# EAGLE board matrixdriver (EAGLE 7.0.0)
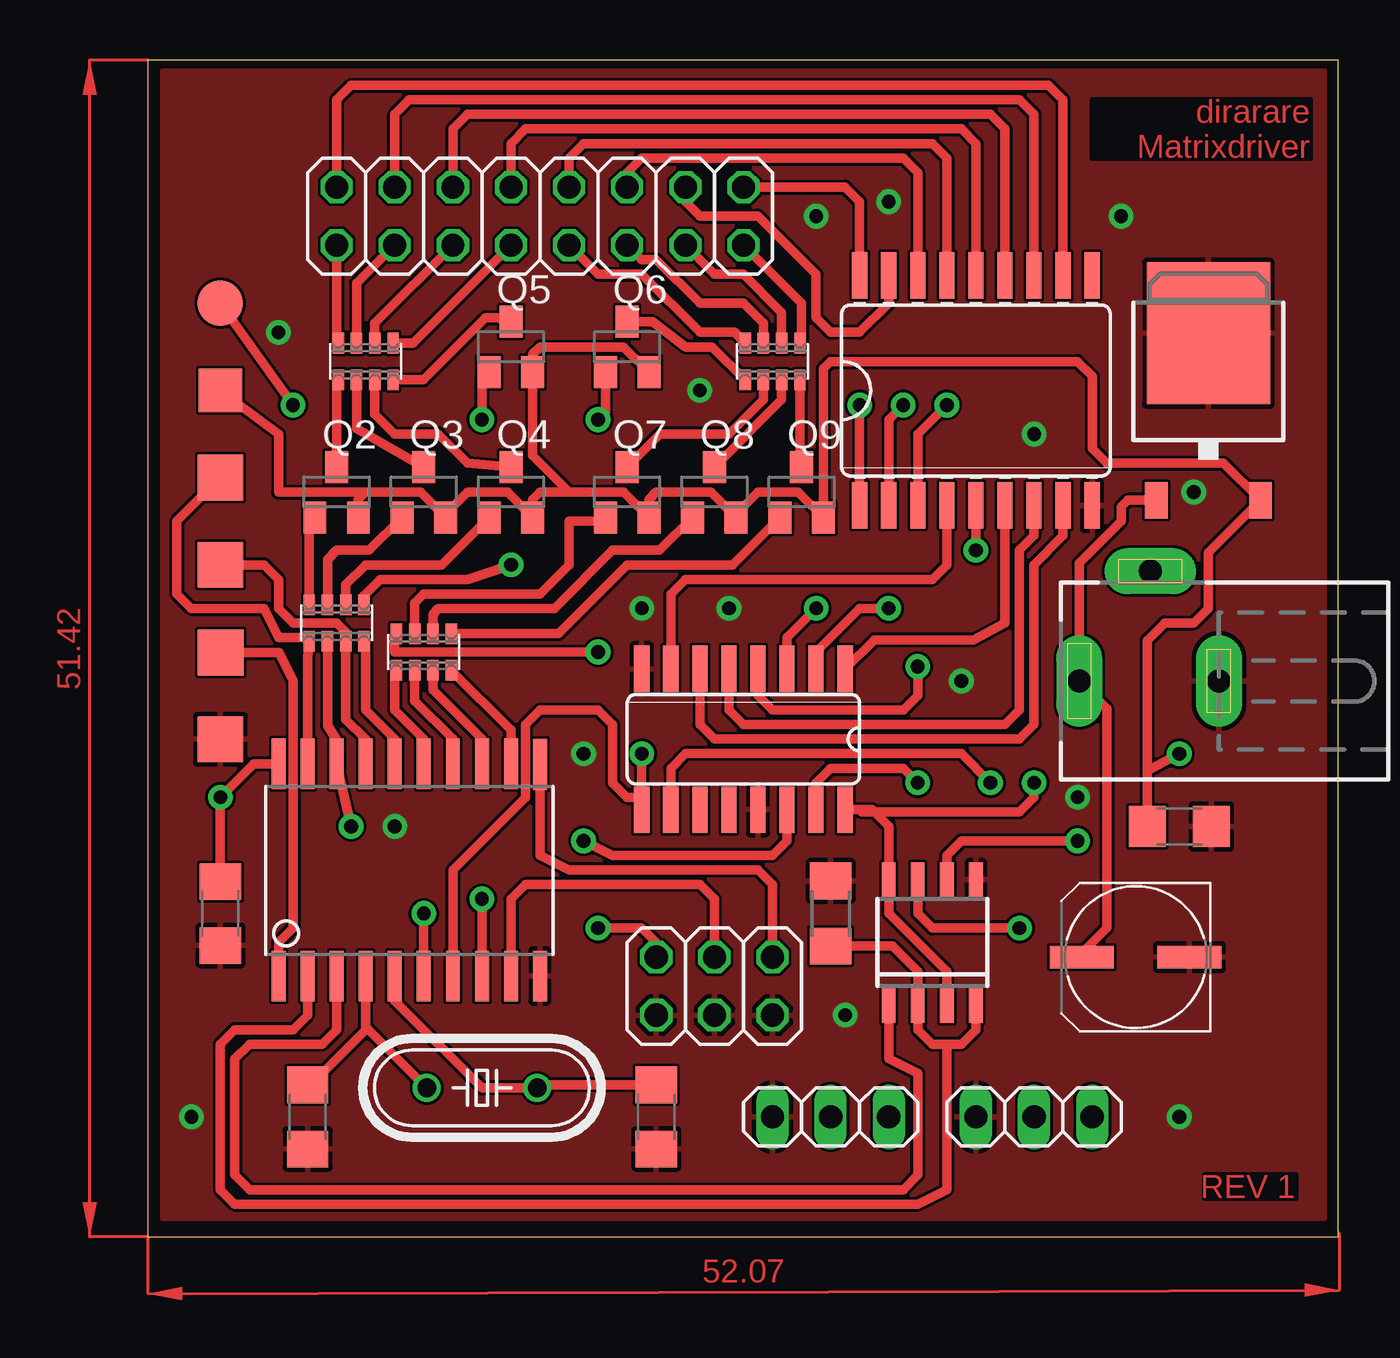
[diagram p0: board, top side]
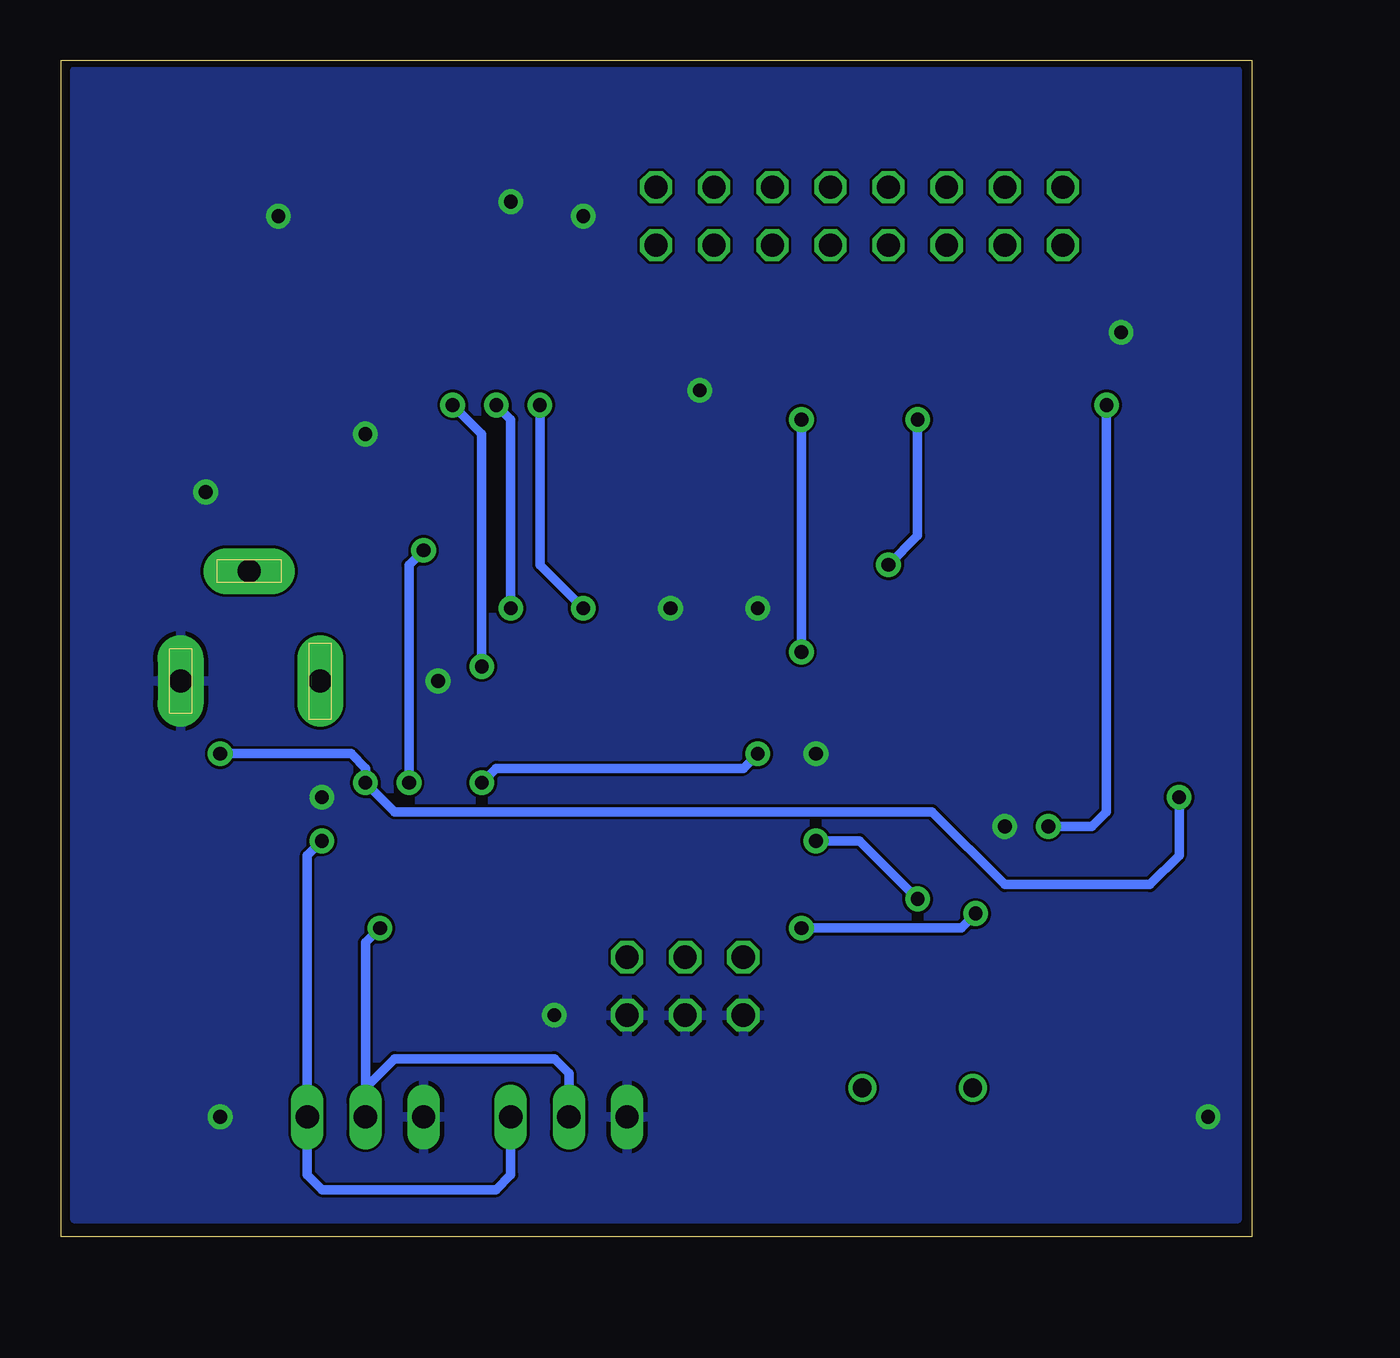
[diagram p1: board, bottom side, seen from below]

Size 52.03 x 51.42 mm. Coordinates in mm from the lower left corner, seen from the top.
Outline: 0,0 52.03,0 52.03,51.42 0,51.42 0,0
Copper layers (1*16): Top 0.035mm / dielectric 1.5mm / Bottom 0.035mm
Design rules "PCB-POOL HighSpec": minimum track width 0.125mm, minimum drill 0.2mm, track to track 0.125mm, track to pad 0.125mm, pad to pad 0.125mm, via to via 0.125mm, smd to smd 0.125mm, copper to edge 0.3mm, drill to drill 0.2mm, minimum pad ring 0.2mm, minimum via ring 0.125mm, stop-mask expansion 0.075mm, vias tented up to drill 0mil, thermal gap 0.2mm

## Footprints (pad centres in the part's own frame; a part is rotated, then mirrored left to right if it is on the bottom)
C1206 = smd 1.6 x 1.8: 1 -1.4,0; 2 1.4,0
UD-6,3X5,8_NICHICON = smd 2.8 x 1: + 2.35,0; - -2.35,0
CTS742C083 = smd 0.5 x 0.9: 1 -1.2,-0.8; 2 -0.4,-0.8; 3 0.4,-0.8; 4 1.2,-0.8; 5 1.2,0.8; 6 0.4,0.8; 7 -0.4,0.8; 8 -1.2,0.8
D_R-PDSO-G8 = smd 0.6 x 1.5: 1 -1.905,-2.75; 2 -0.635,-2.75; 3 0.635,-2.75; 4 1.905,-2.75; 5 1.905,2.75; 6 0.635,2.75; 7 -0.635,2.75; 8 -1.905,2.75
SO16 = smd 0.66 x 2.032: 1 -4.445,-3.073; 2 -3.175,-3.073; 3 -1.905,-3.073; 4 -0.635,-3.073; 5 0.635,-3.073; 6 1.905,-3.073; 7 3.175,-3.073; 8 4.445,-3.073; 9 4.445,3.073; 10 3.175,3.073; 11 1.905,3.073; 12 0.635,3.073; 13 -0.635,3.073; 14 -1.905,3.073; 15 -3.175,3.073; 16 -4.445,3.073
SO18W = smd 0.66 x 2.032: 1 -5.08,-5.029; 2 -3.81,-5.029; 3 -2.54,-5.029; 4 -1.27,-5.029; 5 0,-5.029; 6 1.27,-5.029; 7 2.54,-5.029; 8 3.81,-5.029; 9 5.08,-5.029; 10 5.08,5.029; 11 3.81,5.029; 12 2.54,5.029; 13 1.27,5.029; 14 0,5.029; 15 -1.27,5.029; 16 -2.54,5.029; 17 -3.81,5.029; 18 -5.08,5.029
TO252 = smd 1 x 1.6: 1 -2.28,-4.8; 2 2.28,-4.8 | smd 5.4 x 6.2: 3 0,2.5
DCJ0202 = drill 1 pad 2 long: 1 0,3.1; 2 4.8,0; 3 0,-3
2X08 = drill 1 octagon: 1 -8.89,-1.27; 2 -8.89,1.27; 3 -6.35,-1.27; 4 -6.35,1.27; 5 -3.81,-1.27; 6 -3.81,1.27; 7 -1.27,-1.27; 8 -1.27,1.27; 9 1.27,-1.27; 10 1.27,1.27; 11 3.81,-1.27; 12 3.81,1.27; 13 6.35,-1.27; 14 6.35,1.27; 15 8.89,-1.27; 16 8.89,1.27
1X03 = drill 1.016 long: 1 -2.54,0; 2 0,0; 3 2.54,0
2X03 = drill 1.016 octagon: 1 -2.54,-1.27; 2 -2.54,1.27; 3 0,-1.27; 4 0,1.27; 5 2.54,-1.27; 6 2.54,1.27
SOT23-BEC = smd 1 x 1.4: B -0.95,-1.1; C 0,1.1; E 0.95,-1.1
HC49/S = drill 0.813: 1 -2.413,0; 2 2.413,0
R1206 = smd 1.6 x 1.803: 1 -1.422,0; 2 1.422,0
TP20R = smd 2 x 2: TP 0,0
TP19SQ = smd 1.9 x 1.9: TP 0,0
TP20SQ = smd 2 x 2: TP 0,0
SO20L$ = smd 0.61 x 2.21: 1 -5.715,-4.636; 2 -4.445,-4.636; 3 -3.175,-4.636; 4 -1.905,-4.636; 5 -0.635,-4.636; 6 0.635,-4.636; 7 1.905,-4.636; 8 3.175,-4.636; 9 4.445,-4.636; 10 5.715,-4.636; 11 5.715,4.61; 12 4.445,4.636; 13 3.175,4.636; 14 1.905,4.636; 15 0.635,4.636; 16 -0.635,4.636; 17 -1.905,4.636; 18 -3.175,4.636; 19 -4.445,4.636; 20 -5.715,4.636

## Placement (x,y rotation side)
C1  22p  [C1206]  6.99,5.24 90 top
C2  22p  [C1206]  22.23,5.24 90 top
C3  100µ  [UD-6,3X5,8_NICHICON]  43.18,12.22 180 top
C4  10µ  [C1206]  45.09,17.94 0 top
C5  100n  [C1206]  3.17,14.13 90 top
CTS742C083_1  1k  [CTS742C083]  8.26,26.83 0 top
CTS742C083_2  1k  [CTS742C083]  12.06,25.56 0 top
CTS742C083_3  10  [CTS742C083]  9.53,38.26 0 top
CTS742C083_4  10  [CTS742C083]  27.3,38.26 0 top
IC1  75176AD  [D_R-PDSO-G8]  34.29,12.86 0 top
IC2  4017D  [SO16]  26.04,21.75 180 top
IC3  ULN2803  [SO18W]  36.2,36.99 0 top
IC4  7805DT  [TO252]  46.35,36.99 0 top
J1  DCJ0202  [DCJ0202]  43.81,24.29 90 top
JP1  LIGHTS  [2X08]  17.14,44.61 0 top
JP2  IN  [1X03]  38.73,5.24 180 top
JP3  OUT  [1X03]  29.84,5.24 180 top
JP4  P.SELECT  [2X03]  24.77,10.96 0 top
Q2  MMBT4403LT1SMD  [SOT23-BEC]  8.26,32.54 0 top
Q3  MMBT4403LT1SMD  [SOT23-BEC]  12.06,32.54 0 top
Q4  MMBT4403LT1SMD  [SOT23-BEC]  15.88,32.54 0 top
Q5  MMBT4403LT1SMD  [SOT23-BEC]  15.88,38.89 0 top
Q6  MMBT4403LT1SMD  [SOT23-BEC]  20.95,38.89 0 top
Q7  MMBT4403LT1SMD  [SOT23-BEC]  20.95,32.54 0 top
Q8  MMBT4403LT1SMD  [SOT23-BEC]  24.77,32.54 0 top
Q9  MMBT4403LT1SMD  [SOT23-BEC]  28.57,32.54 0 top
Q10  20MHZ  [HC49/S]  14.61,6.51 180 top
R17  1k  [R1206]  29.84,14.13 90 top
TP1  TPSQTP20R  [TP20R]  3.17,40.8 270 top
TP2  TPSQTP19SQ  [TP19SQ]  3.17,36.99 270 top
TP3  TPSQTP20SQ  [TP20SQ]  3.17,33.18 270 top
TP4  TPSQTP20SQ  [TP20SQ]  3.17,29.37 0 top
TP5  TPSQTP20SQ  [TP20SQ]  3.19,25.53 270 top
TP6  TPSQTP20SQ  [TP20SQ]  3.17,21.75 270 top
U$1  TINY2313  [SO20L$]  11.43,16.04 0 top

## Library data of the parts
C1 C2 C5 R17 = resistor
C3 C4 = rcl
CTS742C083_1-CTS742C083_4 = resistor-net
IC1 = 751xx
IC2 = 40xx
IC3 = uln-udn
IC4 = linear
J1 = con-jack; OC_FARNELL: unknown; OC_NEWARK: unknown
JP1 = pinhead-fixdrills
JP2-JP4 = pinhead
Q2-Q9 = transistor-pnp
Q10 = adafruit; OC_FARNELL: 1667008; OC_NEWARK: unknown
TP1-TP6 = testpad
U$1 = avr-6

## Nets
GND [GND]: C1.1 C2.1 C3.- C4.2 C5.1 IC1.5 IC2.8 IC2.13 IC3.9 IC4.3 J1.3 JP2.3 JP3.3 JP4.1 JP4.3 JP4.5 R17.2 TP6.TP U$1.10
N$1: CTS742C083_2.4 U$1.12
N$2: CTS742C083_2.3 U$1.13
N$3: CTS742C083_2.2 U$1.14
N$4: CTS742C083_2.1 U$1.15
N$5: CTS742C083_1.4 U$1.16
N$6: CTS742C083_1.3 TP4.TP U$1.17
N$7: CTS742C083_1.2 TP1.TP U$1.18
N$8: CTS742C083_1.1 TP3.TP U$1.19
N$9: IC1.1 U$1.3
N$10: IC1.2 IC1.4 R17.1 U$1.2
N$11: C1.2 Q10.2 U$1.4
N$12: C2.2 Q10.1 U$1.5
N$13: CTS742C083_4.8 JP1.9
N$14: IC3.11 JP1.2
N$15: IC2.14 U$1.8
N$16: IC2.9 IC2.15 U$1.7
N$17: IC2.3 IC3.1
N$18: IC2.2 IC3.2
N$19: IC2.4 IC3.3
N$20: IC2.7 IC3.4
N$21: IC2.10 IC3.5
N$22: IC2.1 IC3.6
N$23: IC2.5 IC3.7
N$24: IC2.6 IC3.8
N$25: IC3.18 JP1.16
N$26: IC3.17 JP1.14
N$27: IC3.16 JP1.12
N$28: IC3.15 JP1.10
N$29: CTS742C083_4.7 JP1.11
N$30: CTS742C083_4.6 JP1.13
N$31: CTS742C083_4.5 JP1.15
N$32: CTS742C083_1.7 Q3.B
N$33: CTS742C083_3.8 JP1.1
N$34: CTS742C083_3.7 JP1.3
N$35: CTS742C083_3.6 JP1.5
N$36: CTS742C083_3.5 JP1.7
N$37: CTS742C083_1.8 Q2.B
N$38: CTS742C083_1.6 Q4.B
N$39: CTS742C083_1.5 Q5.B
N$40: CTS742C083_2.6 Q8.B
N$41: CTS742C083_2.5 Q9.B
N$42: CTS742C083_2.8 Q6.B
N$43: CTS742C083_2.7 Q7.B
N$49: CTS742C083_4.4 Q9.C
N$50: CTS742C083_4.3 Q8.C
N$51: CTS742C083_4.2 Q7.C
N$52: CTS742C083_4.1 Q6.C
N$53: CTS742C083_3.4 Q5.C
N$54: CTS742C083_3.3 Q4.C
N$55: CTS742C083_3.2 Q3.C
N$56: CTS742C083_3.1 Q2.C
N$57: IC1.6 JP2.1 JP3.1
N$58: IC1.7 JP2.2 JP3.2
N$59: TP5.TP U$1.1
N$60: JP4.2 U$1.6
N$61: JP4.4 U$1.9
N$62: JP4.6 U$1.11
N$63: IC3.12 JP1.4
N$64: IC3.13 JP1.6
N$65: C3.+ IC4.1 J1.1
N$66: IC3.14 JP1.8
VCC: C4.1 C5.2 IC1.3 IC1.8 IC2.16 IC4.2 Q2.E Q3.E Q4.E Q5.E Q6.E Q7.E Q8.E Q9.E TP2.TP U$1.20

## Tracks (layer width: path | path; a pad name or v marks a point on that pad's centre or on a via)
GND  (via drill 0.6)
  other vias: 5.71,39.53 21.59,27.46 30.48,9.69 45.09,5.24 10.79,17.94 45.72,32.54 38.73,35.08 25.4,27.46 29.21,44.61 32.38,45.24 42.55,44.61 1.91,5.24 40.64,19.21 24.13,36.99 35.56,24.29 19.05,21.11
  pour Bottom (isolate 0.003): 0.64,50.96 0.64,0.8 51.44,0.8 51.44,50.96
  pour Top (isolate 0.003): 0.64,50.96 0.64,0.8 51.44,0.8 51.44,50.96
N$1
  Top 0.406: CTS742C083_2.4 15.88,22.15 U$1.12
N$2
  Top 0.406: CTS742C083_2.3 12.46,23.89 14.61,21.75 U$1.13
N$3
  Top 0.406: CTS742C083_2.2 11.66,23.42 13.34,21.75 U$1.14
N$4
  Top 0.406: CTS742C083_2.1 10.79,24.69 10.79,23.02 12.06,21.75 U$1.15
N$5
  Top 0.406: CTS742C083_1.4 9.53,26.03 9.53,23.02 10.79,21.75 U$1.16
N$6
  Top 0.406: TP4.TP 5.08,29.37 5.71,28.73 5.71,27.46 6.35,26.83 8.26,26.83 8.65,26.43 CTS742C083_1.3 8.65,22.62 9.53,21.75 U$1.17
N$7  (via drill 0.6)
  Top 0.406: TP1.TP v6.35,36.35 | v8.89,17.94 U$1.18 | CTS742C083_1.2 7.86,22.34 8.26,21.71 U$1.18 | 8.26,20.48 U$1.18
  Bottom 0.406: v6.35,36.35 6.35,18.57 6.99,17.94 v8.89,17.94
N$8
  Top 0.406: U$1.19 6.99,25.32 CTS742C083_1.1 6.89,26.2 5.71,26.2 5.08,27.46 1.91,27.46 1.27,28.1 1.27,31.27 TP3.TP
N$9
  Top 0.406: U$1.3 8.26,9.05 7.62,8.42 4.45,8.42 3.81,7.78 3.81,2.7 4.45,2.06 33.02,2.06 33.66,2.7 33.66,7.15 32.38,7.78 IC1.1
N$10
  Top 0.406: U$1.2 6.99,9.69 6.35,9.05 3.81,9.05 3.17,8.42 3.17,2.06 3.81,1.43 33.66,1.43 34.92,2.06 34.92,8.42 | 34.92,8.42 34.29,8.42 33.66,9.05 IC1.2 33.66,11.59 32.54,12.71 R17.1 | IC1.4 36.2,9.05 35.56,8.42 34.92,8.42
N$11
  Top 0.406: Q10.2 9.59,9.11 | 9.59,9.11 9.53,9.18 U$1.4 | C1.2 7.12,6.64 9.59,9.11
N$12
  Top 0.406: U$1.5 10.79,10.32 14.61,6.51 Q10.1 17.15,6.64 C2.2
N$13
  Top 0.406: JP1.9 19.68,42.07 21.59,42.07 24.13,39.53 25.64,39.53 CTS742C083_4.8
N$14
  Top 0.406: JP1.2 8.26,49.69 8.89,50.32 39.37,50.32 40.01,49.69 IC3.11
N$15  (via drill 0.6)
  Top 0.406: IC2.14 27.94,17.3 27.3,16.67 20.32,16.67 v19.05,17.3 | v14.61,14.77 U$1.8
  Bottom 0.406: v19.05,17.3 17.14,17.3 v14.61,14.77
N$16  (via drill 0.6)
  Top 0.406: IC2.15 29.21,19.84 29.84,20.48 33.02,20.48 v33.66,19.84 | v21.59,21.11 21.59,19.21 | 21.59,19.21 IC2.9 | U$1.7 13.34,16.04 16.51,19.21 16.51,22.39 17.14,23.02 19.68,23.02 20.32,22.39 20.32,19.84 20.95,19.21 21.59,19.21
  Bottom 0.406: v33.66,19.84 33.02,20.48 22.23,20.48 v21.59,21.11
N$17  (via drill 0.6)
  Top 0.406: IC2.3 27.94,26.2 v29.21,27.46 | v31.11,36.35 IC3.1
  Bottom 0.406: v29.21,27.46 31.11,29.37 v31.11,36.35
N$18  (via drill 0.6)
  Top 0.406: IC2.2 29.21,25.56 31.11,27.46 v32.38,27.46 | v33.02,36.35 32.38,35.72 IC3.2
  Bottom 0.406: v32.38,27.46 32.38,35.72 v33.02,36.35
N$19  (via drill 0.6)
  Top 0.406: IC2.4 26.67,23.66 27.3,23.02 33.02,23.02 33.66,23.66 v33.66,24.93 | v34.92,36.35 33.66,35.08 IC3.3
  Bottom 0.406: v33.66,24.93 33.66,35.08 v34.92,36.35
N$20
  Top 0.406: IC2.7 22.86,28.1 23.5,28.73 34.29,28.73 34.92,29.37 IC3.4
N$21  (via drill 0.6)
  Top 0.406: IC3.5 v36.2,30 | v36.83,19.84 35.56,21.11 23.5,21.11 22.86,20.48 IC2.10
  Bottom 0.406: v36.2,30 36.83,29.37 v36.83,19.84
N$22
  Top 0.406: IC3.6 37.47,26.83 36.09,26.09 31.75,26.09 IC2.1
N$23
  Top 0.406: IC2.5 25.4,23.02 26.04,22.39 37.47,22.39 38.1,23.02 38.1,30 38.73,30.64 IC3.7
N$24
  Top 0.406: IC2.6 24.13,22.39 24.77,21.75 38.1,21.75 38.73,22.39 38.73,29.37 40.01,30.64 IC3.8
N$25
  Top 0.406: JP1.16 30.48,45.88 31.11,45.24 IC3.18
N$26
  Top 0.406: JP1.14 23.5,45.24 24.13,44.61 26.67,44.61 29.21,42.07 29.21,40.16 29.84,39.53 31.11,39.53 32.38,40.8 IC3.17
N$27
  Top 0.406: JP1.12 20.95,46.51 21.59,47.15 33.02,47.15 33.66,46.51 IC3.16
N$28
  Top 0.406: JP1.10 18.41,47.15 19.05,47.78 34.29,47.78 34.92,47.15 IC3.15
N$29
  Top 0.406: JP1.11 21.59,42.7 22.23,42.7 24.13,40.8 26.04,40.8 26.91,39.93 CTS742C083_4.7
N$30
  Top 0.406: JP1.13 24.77,42.07 26.04,42.07 27.7,40.4 CTS742C083_4.6
N$31
  Top 0.406: JP1.15 28.57,40.8 28.57,39.13 CTS742C083_4.5
N$32
  Top 0.406: Q3.B 9.68,30 8.26,30 7.86,29.61 CTS742C083_1.7
N$33
  Top 0.406: JP1.1 8.26,39.13 CTS742C083_3.8
N$34
  Top 0.406: JP1.3 9.12,41.67 CTS742C083_3.7
N$35
  Top 0.406: JP1.5 9.93,39.93 CTS742C083_3.6
N$36
  Top 0.406: JP1.7 11.6,39.06 CTS742C083_3.5
N$37
  Top 0.406: Q2.B 7.05,31.2 CTS742C083_1.8
N$38
  Top 0.406: CTS742C083_1.6 8.65,28.5 9.53,29.37 12.85,29.37 Q4.B
N$39  (via drill 0.6)
  Top 0.406: CTS742C083_1.5 9.46,28.03 10.16,28.73 13.97,28.73 v15.88,29.37 | v14.61,35.72 14.61,37.47 Q5.B
  Bottom 0.406: v15.88,29.37 14.61,30.64 v14.61,35.72
N$40
  Top 0.406: CTS742C083_2.6 12.46,27.23 12.7,27.46 17.78,27.46 20.32,30 22.38,30 Q8.B
N$41
  Top 0.406: CTS742C083_2.5 17.95,26.36 20.95,29.37 25.55,29.37 Q9.B
N$42  (via drill 0.6)
  Top 0.406: CTS742C083_2.8 10.79,26.29 10.79,25.56 v19.68,25.56 | v19.68,35.72 20,36.04 Q6.B
  Bottom 0.406: v19.68,25.56 v19.68,35.72
N$43
  Top 0.406: CTS742C083_2.7 11.66,27.7 12.06,28.1 17.14,28.1 18.41,29.37 18.41,31.27 19.84,31.27 Q7.B
N$49
  Top 0.406: CTS742C083_4.4 28.5,33.71 Q9.C
N$50
  Top 0.406: CTS742C083_4.3 27.7,36.58 Q8.C
N$51
  Top 0.406: CTS742C083_4.2 26.91,36.59 25.4,35.08 22.39,35.08 Q7.C
N$52
  Top 0.406: CTS742C083_4.1 24.67,38.89 23.5,38.89 22.05,39.99 Q6.C
N$53
  Top 0.406: CTS742C083_3.4 12.06,37.46 14.77,40.16 15.24,40.16 Q5.C
N$54
  Top 0.406: CTS742C083_3.3 9.93,35.95 10.79,35.08 12.7,35.08 13.97,33.81 Q4.C
N$55
  Top 0.406: CTS742C083_3.2 9.12,35.31 Q3.C
N$56
  Top 0.406: CTS742C083_3.1 8.26,37.39 Q2.C
N$57  (via drill 0.6)
  Top 0.406: v40.64,17.3 35.56,17.3 34.92,16.67 IC1.6
  Bottom 0.406: v40.64,17.3 41.27,16.67 JP2.1 41.27,2.7 40.64,2.06 33.02,2.06 32.38,2.7 JP3.1
N$58  (via drill 0.6)
  Top 0.406: v38.1,13.5 34.29,13.5 33.66,14.13 IC1.7
  Bottom 0.406: v38.1,13.5 38.73,12.86 JP2.2 38.73,6.51 37.47,7.78 30.48,7.78 29.84,7.15 JP3.2
N$59
  Top 0.406: TP5.TP 5.74,25.54 6.35,24.29 6.35,13.5 5.71,12.86 U$1.1
N$60  (via drill 0.6)
  Top 0.406: JP4.2 22.23,12.86 21.59,13.5 v19.68,13.5 | v12.06,14.13 U$1.6
  Bottom 0.406: v19.68,13.5 12.7,13.5 v12.06,14.13
N$61
  Top 0.406: JP4.4 24.77,14.77 24.13,15.4 16.51,15.4 15.88,14.77 U$1.9
N$62
  Top 0.406: JP4.6 27.3,15.4 26.67,16.04 18.41,16.04 17.14,16.67 U$1.11
N$63
  Top 0.406: JP1.4 10.79,49.05 11.43,49.69 38.1,49.69 38.73,49.05 IC3.12
N$64
  Top 0.406: JP1.6 13.34,48.42 13.97,49.05 36.83,49.05 37.47,48.42 IC3.13
N$65
  Top 0.406: IC4.1 42.83,32.19 42.55,31.91 42.55,31.27 40.72,29.45 J1.1 41.91,23.09 41.91,13.5 40.83,12.42 C3.+
N$66
  Top 0.406: JP1.8 15.88,47.78 16.51,48.42 35.56,48.42 36.2,47.78 IC3.14
VCC  (via drill 0.6)
  Top 0.406: Q2.E 9.21,32.22 9.53,32.54 | 9.53,32.54 11.91,32.54 Q3.E 13.02,31.59 13.97,32.54 15.72,32.54 Q4.E 16.82,32.22 17.14,32.54 18.41,32.54 | 18.41,32.54 20.8,32.54 Q7.E 21.91,32.22 22.23,32.54 24.61,32.54 Q8.E 25.71,31.59 26.67,32.54 28.43,32.54 Q9.E 29.52,37.94 29.84,38.26 40.64,38.26 41.27,37.62 41.27,34.45 41.91,33.81 47.01,33.81 IC4.2 46.35,29.91 46.35,27.46 45.72,26.83 44.45,26.83 43.69,26.07 43.69,20.35 | Q6.E 20.8,38.89 17.14,38.89 16.82,38.57 Q5.E 16.82,34.13 18.41,32.54 | IC1.3 34.92,11.59 32.38,14.13 IC1.8 32.38,17.94 31.65,18.68 31.11,18.68 | IC2.16 31.11,18.68 | C4.1 43.69,20.35 | 43.69,20.35 v45.09,21.11 | v38.73,19.84 38.73,19.21 38.1,18.57 31.22,18.57 31.11,18.68 | TP2.TP 5.71,35.08 5.71,32.54 9.53,32.54 | U$1.20 4.64,20.67 v3.17,19.21 C5.2
  Bottom 0.406: v45.09,21.11 39.37,21.11 38.73,20.48 v38.73,19.84 37.47,18.57 13.97,18.57 10.79,15.4 4.45,15.4 3.17,16.67 v3.17,19.21
(copper drawn outside any net)
  shapes: Top area x2

## Text on the board
Top: dirarare / Matrixdriver | REV 1